# EAGLE board Lightbox (EAGLE 9.2.0)
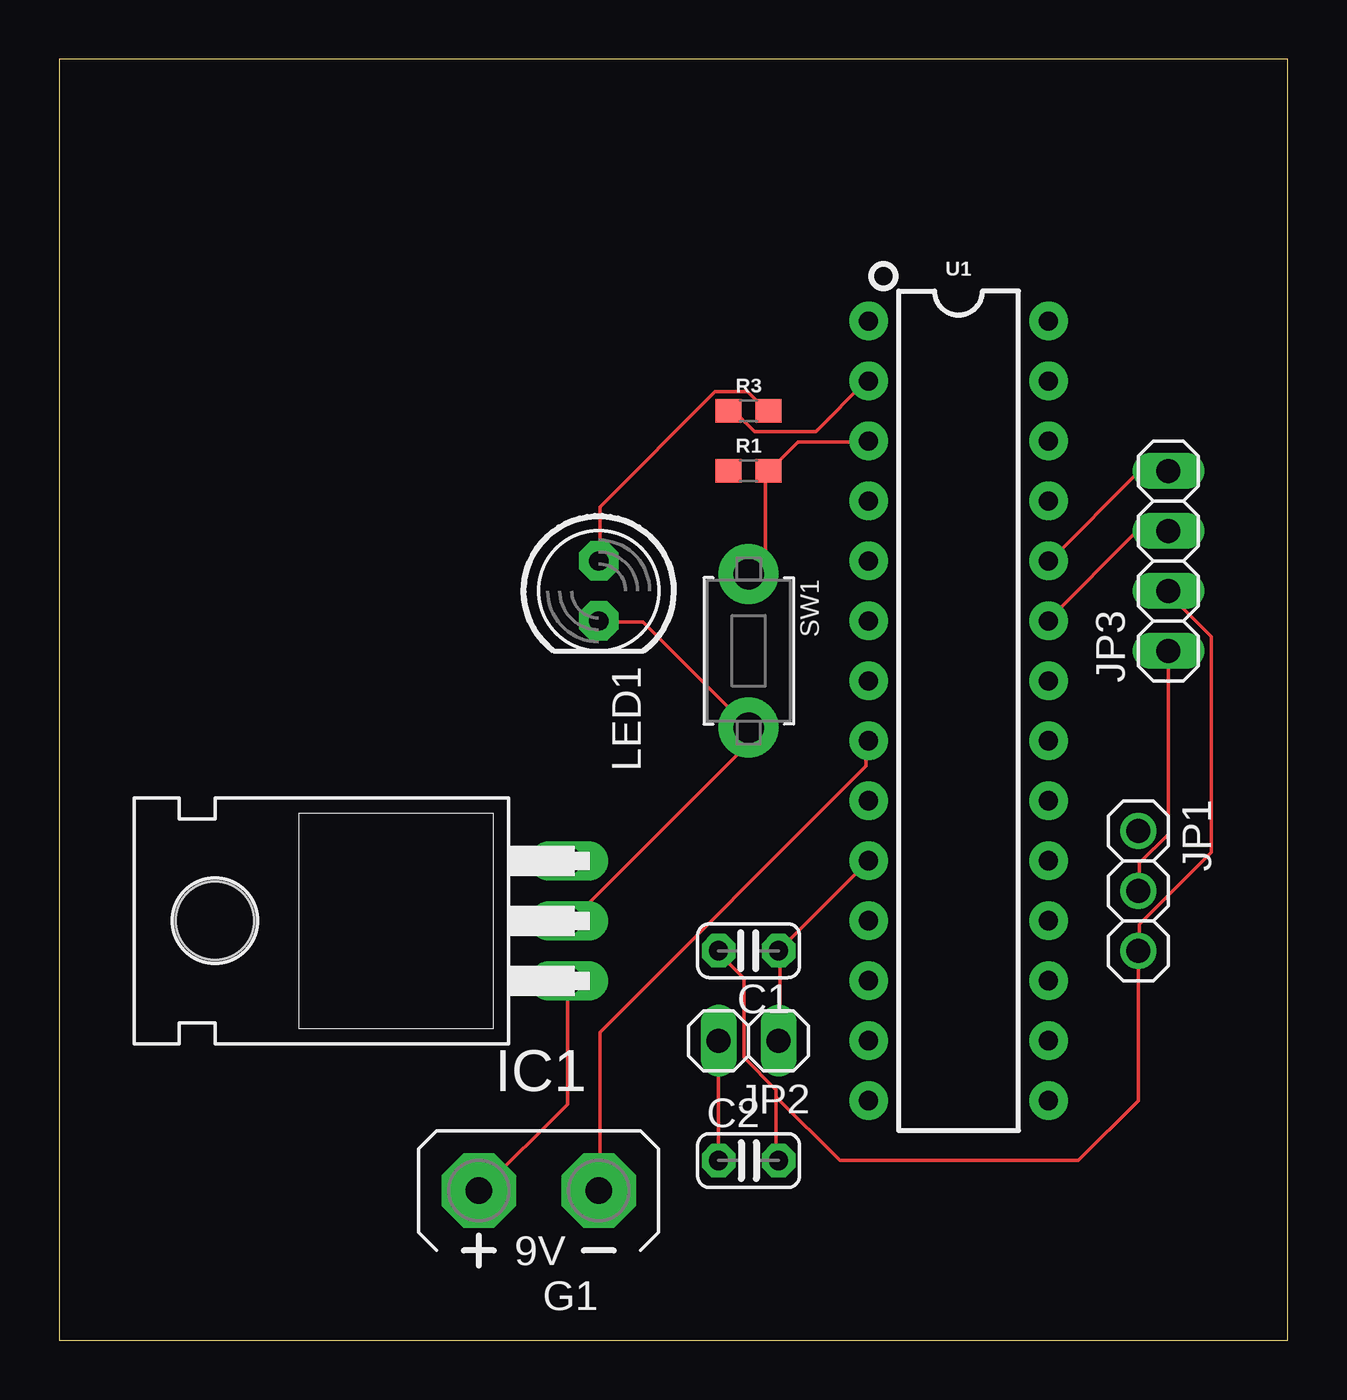
[diagram p0: board, top side]
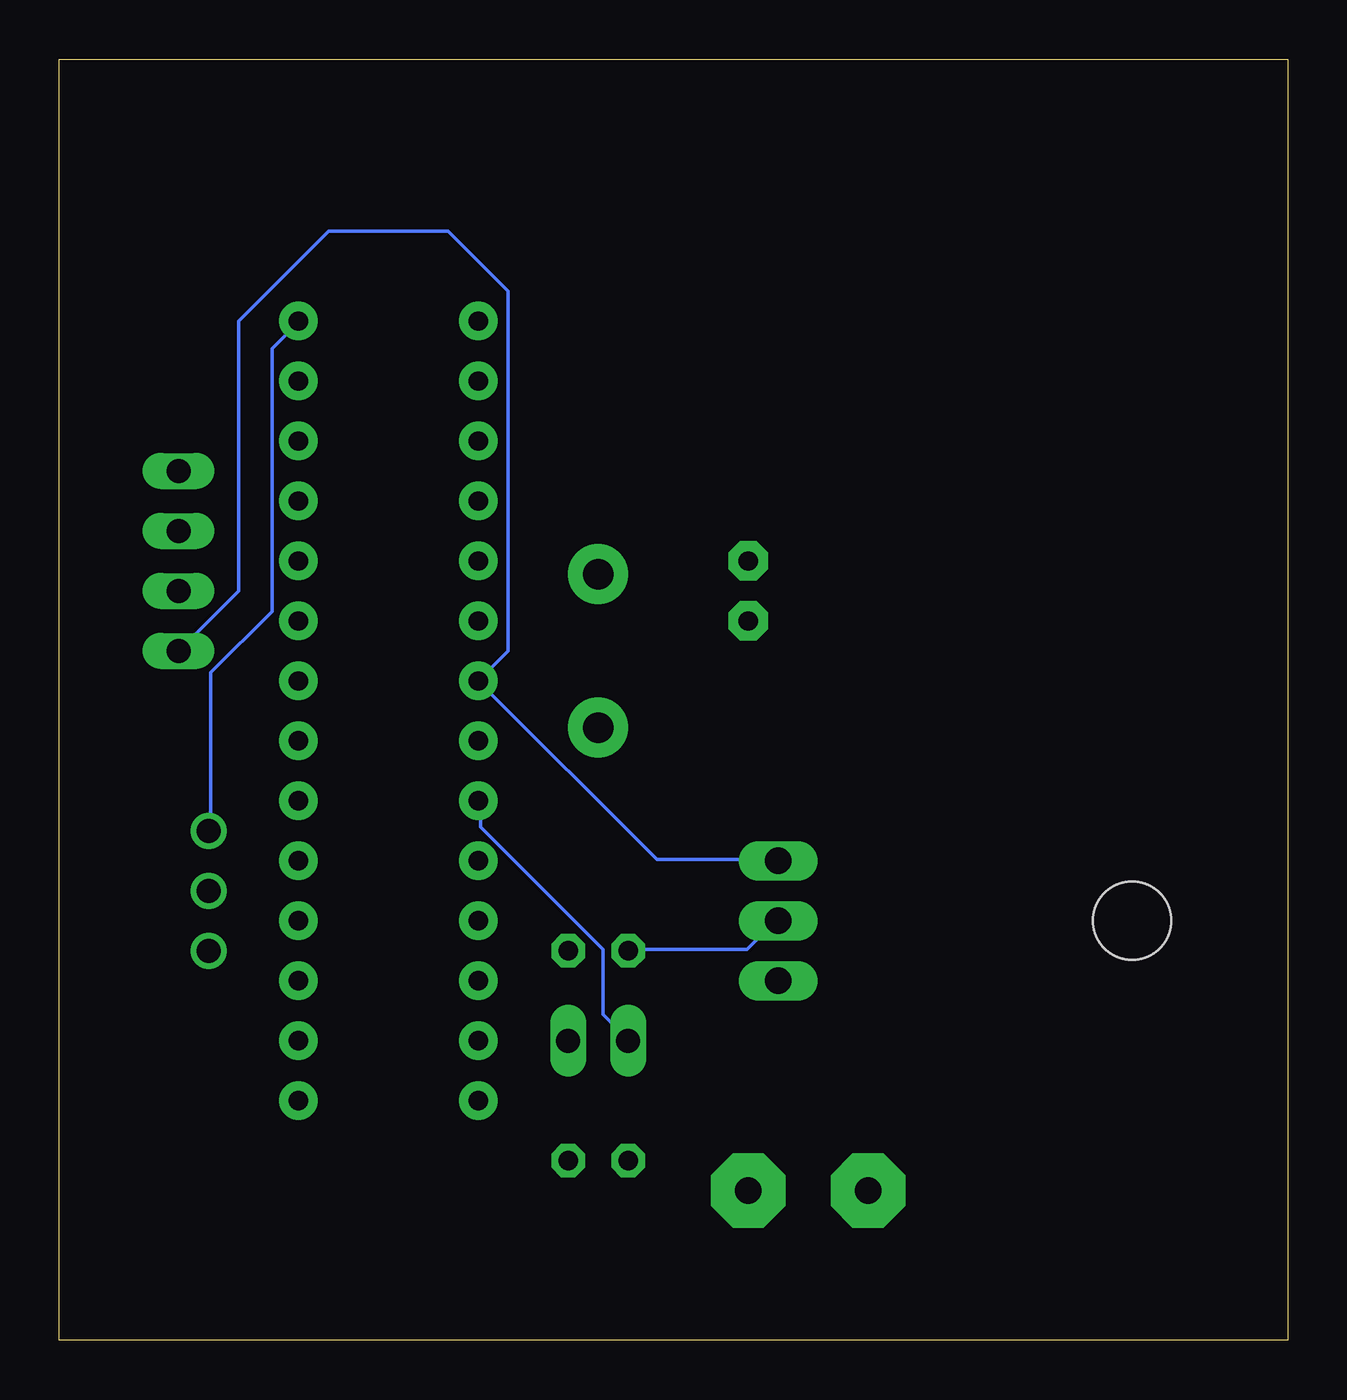
[diagram p1: board, bottom side, seen from below]

Size 52.05 x 54.28 mm. Coordinates in mm from the lower left corner, seen from the top.
Outline: 0,0 52.05,0 52.05,54.28 0,54.28 0,0
Copper layers (1*16): Top 0.035mm / dielectric 1.5mm / Bottom 0.035mm
Design rules "default": minimum track width 6mil, minimum drill 0.35mm, track to track 6mil, track to pad 6mil, pad to pad 6mil, via to via 6mil, smd to smd 6mil, copper to edge 40mil, drill to drill 6mil, minimum pad ring 10mil, minimum via ring 8mil, stop-mask expansion 4mil, vias tented up to drill 0mil, thermal gap 10mil

## Footprints (pad centres in the part's own frame; a part is rotated, then mirrored left to right if it is on the bottom)
C025-024X044 = drill 0.813 pad 1.422 octagon: 1 -1.27,0; 2 1.27,0
AB9V = drill 1.118 pad 3.15 octagon: + 0,2.54; - 0,-2.54
TO220H = drill 1.118 long: 1 -2.54,-10.16; 2 0,-10.16; 3 2.54,-10.16 | hole 3.302: 0,4.826
1X03 = drill 1.016: 1 -2.54,0; 2 0,0; 3 2.54,0
1X02 = drill 1.016 long: 1 -1.27,0; 2 1.27,0
1X04 = drill 1.016 long: 1 -3.81,0; 2 -1.27,0; 3 1.27,0; 4 3.81,0
LED5MM = drill 0.813 pad 1.676 octagon: A -1.27,0; K 1.27,0
0603 = smd 1.1 x 1: 1 -0.85,0; 2 0.85,0
TACT_PANA-EVQ = drill 1.3 pad 2.54: P$1 -3.25,0; P$2 3.25,0
DIP28 = drill 0.813 pad 1.626: 1 -16.51,-3.81; 2 -13.97,-3.81; 3 -11.43,-3.81; 4 -8.89,-3.81; 5 -6.35,-3.81; 6 -3.81,-3.81; 7 -1.27,-3.81; 8 1.27,-3.81; 9 3.81,-3.81; 10 6.35,-3.81; 11 8.89,-3.81; 12 11.43,-3.81; 13 13.97,-3.81; 14 16.51,-3.81; 15 16.51,3.81; 16 13.97,3.81; 17 11.43,3.81; 18 8.89,3.81; 19 6.35,3.81; 20 3.81,3.81; 21 1.27,3.81; 22 -1.27,3.81; 23 -3.81,3.81; 24 -6.35,3.81; 25 -8.89,3.81; 26 -11.43,3.81; 27 -13.97,3.81; 28 -16.51,3.81

## Placement (x,y rotation side)
C1  22pF  [C025-024X044]  29.21,16.51 180 top
C2  22pF  [C025-024X044]  29.21,7.62 0 top
G1  AB9V  [AB9V]  20.32,6.35 90 top
IC1  7805T  [TO220H]  11.43,17.78 90 top
JP1  [1X03]  45.72,19.05 270 top
JP2  [1X02]  29.21,12.7 180 top
JP3  [1X04]  46.99,33.02 90 top
LED1  [LED5MM]  22.86,31.75 270 top
R1  150  [0603]  29.21,36.83 0 top
R3  150  [0603]  29.21,39.37 0 top
SW1  [TACT_PANA-EVQ]  29.21,29.21 270 top
U1  328P  [DIP28]  38.1,26.67 270 top

## Library data of the parts
C1 C2 IC1 JP1 LED1 SW1 = adafruit
G1 = battery
JP2 JP3 = pinhead
R1 R3 = SparkFun-Resistors; PROD_ID: RES-11028
U1 = SparkFun-IC-Microcontroller; PROD_ID: IC-09136

## Nets
GND: C1.2 C2.2 IC1.2 JP1.3 JP3.2 LED1.K SW1.P$2
N$1: JP3.3 U1.23
N$2: JP3.4 U1.24
N$3: G1.+ IC1.1
N$4: G1.- U1.8
N$5: IC1.3 JP1.2 JP3.1 U1.7
N$6: LED1.A R3.2
N$7: R3.1 U1.2
N$8: C2.1 JP2.2 U1.9
N$9: C1.1 JP2.1 U1.10
N$10: R1.2 SW1.P$1 U1.3
N$12: JP1.1 U1.28
VCC: R1.1

## Tracks (layer width: path | path; a pad name or v marks a point on that pad's centre or on a via)
GND
  Top 0.152: JP3.2 46.99,31.65 48.82,29.82 48.82,20.68 45.77,17.63 45.77,16.56 JP1.3 45.72,10.16 43.18,7.62 33.07,7.62 30.38,10.31 | LED1.K 22.91,30.43 24.74,30.43 29.16,26.01 SW1.P$2 29.16,25.86 29.16,25.25 21.69,17.78 IC1.2 | 30.38,10.31 30.38,10.62 29.01,11.99 29.01,15.34 27.94,16.41 C1.2 | 30.38,10.31 30.38,7.72 C2.2
  Bottom 0.152: C1.2 27.94,16.56 22.91,16.56 21.69,17.78 IC1.2
N$1
  Top 0.152: JP3.3 46.99,34.24 45.62,34.24 41.96,30.58 U1.23
N$2
  Top 0.152: JP3.4 45.77,36.83 41.96,33.02 U1.24
N$3
  Top 0.152: IC1.1 21.54,15.19 21.54,10.01 17.88,6.35 G1.+
N$4
  Top 0.152: U1.8 34.19,25.4 34.19,24.33 22.91,13.06 22.91,6.35 G1.-
N$5
  Top 0.152: JP3.1 46.99,21.44 45.77,20.22 45.77,19.15 JP1.2 | 34.34,27.99 U1.7
  Bottom 0.152: IC1.3 21.69,20.37 26.72,20.37 U1.7 33.02,29.21 33.02,44.45 35.56,46.99 40.64,46.99 44.45,43.18 44.45,31.75 JP3.1
N$6
  Top 0.152: R3.2 29.92,39.42 29.16,40.18 27.79,40.18 22.91,35.31 22.91,33.02 LED1.A
N$7
  Top 0.152: R3.1 28.4,39.27 28.7,39.27 29.46,38.51 32.05,38.51 34.19,40.64 U1.2
N$8
  Top 0.152: JP2.2 C2.1
  Bottom 0.152: U1.9 34.19,22.81 34.19,21.74 29.01,16.56 29.01,13.82 27.94,12.75 JP2.2
N$9
  Top 0.152: JP2.1 30.53,12.75 30.53,16.41 C1.1 U1.10
N$10
  Top 0.152: SW1.P$1 29.31,32.56 29.92,33.17 29.92,36.83 R1.2 30.07,36.83 31.29,38.05 34.19,38.05 U1.3
N$12
  Bottom 0.152: JP1.1 45.62,21.59 45.62,28.3 43.03,30.89 43.03,42.01 41.96,43.08 U1.28